# Altium PCB LP_LED_CUBE_8x8x8.PcbDoc (part 1 of 2)
Units mil, origin at the board's own origin, x right, y up, seen from the top; angles counter-clockwise.
Board outline 5225 x 2860 mil, 2 copper layers (Top Layer, Bottom Layer), stack 42.17 mil thick; 161 components, 194 nets, 901 pads, 1 vias.
Unrouted connection lines stored in the file: 1.
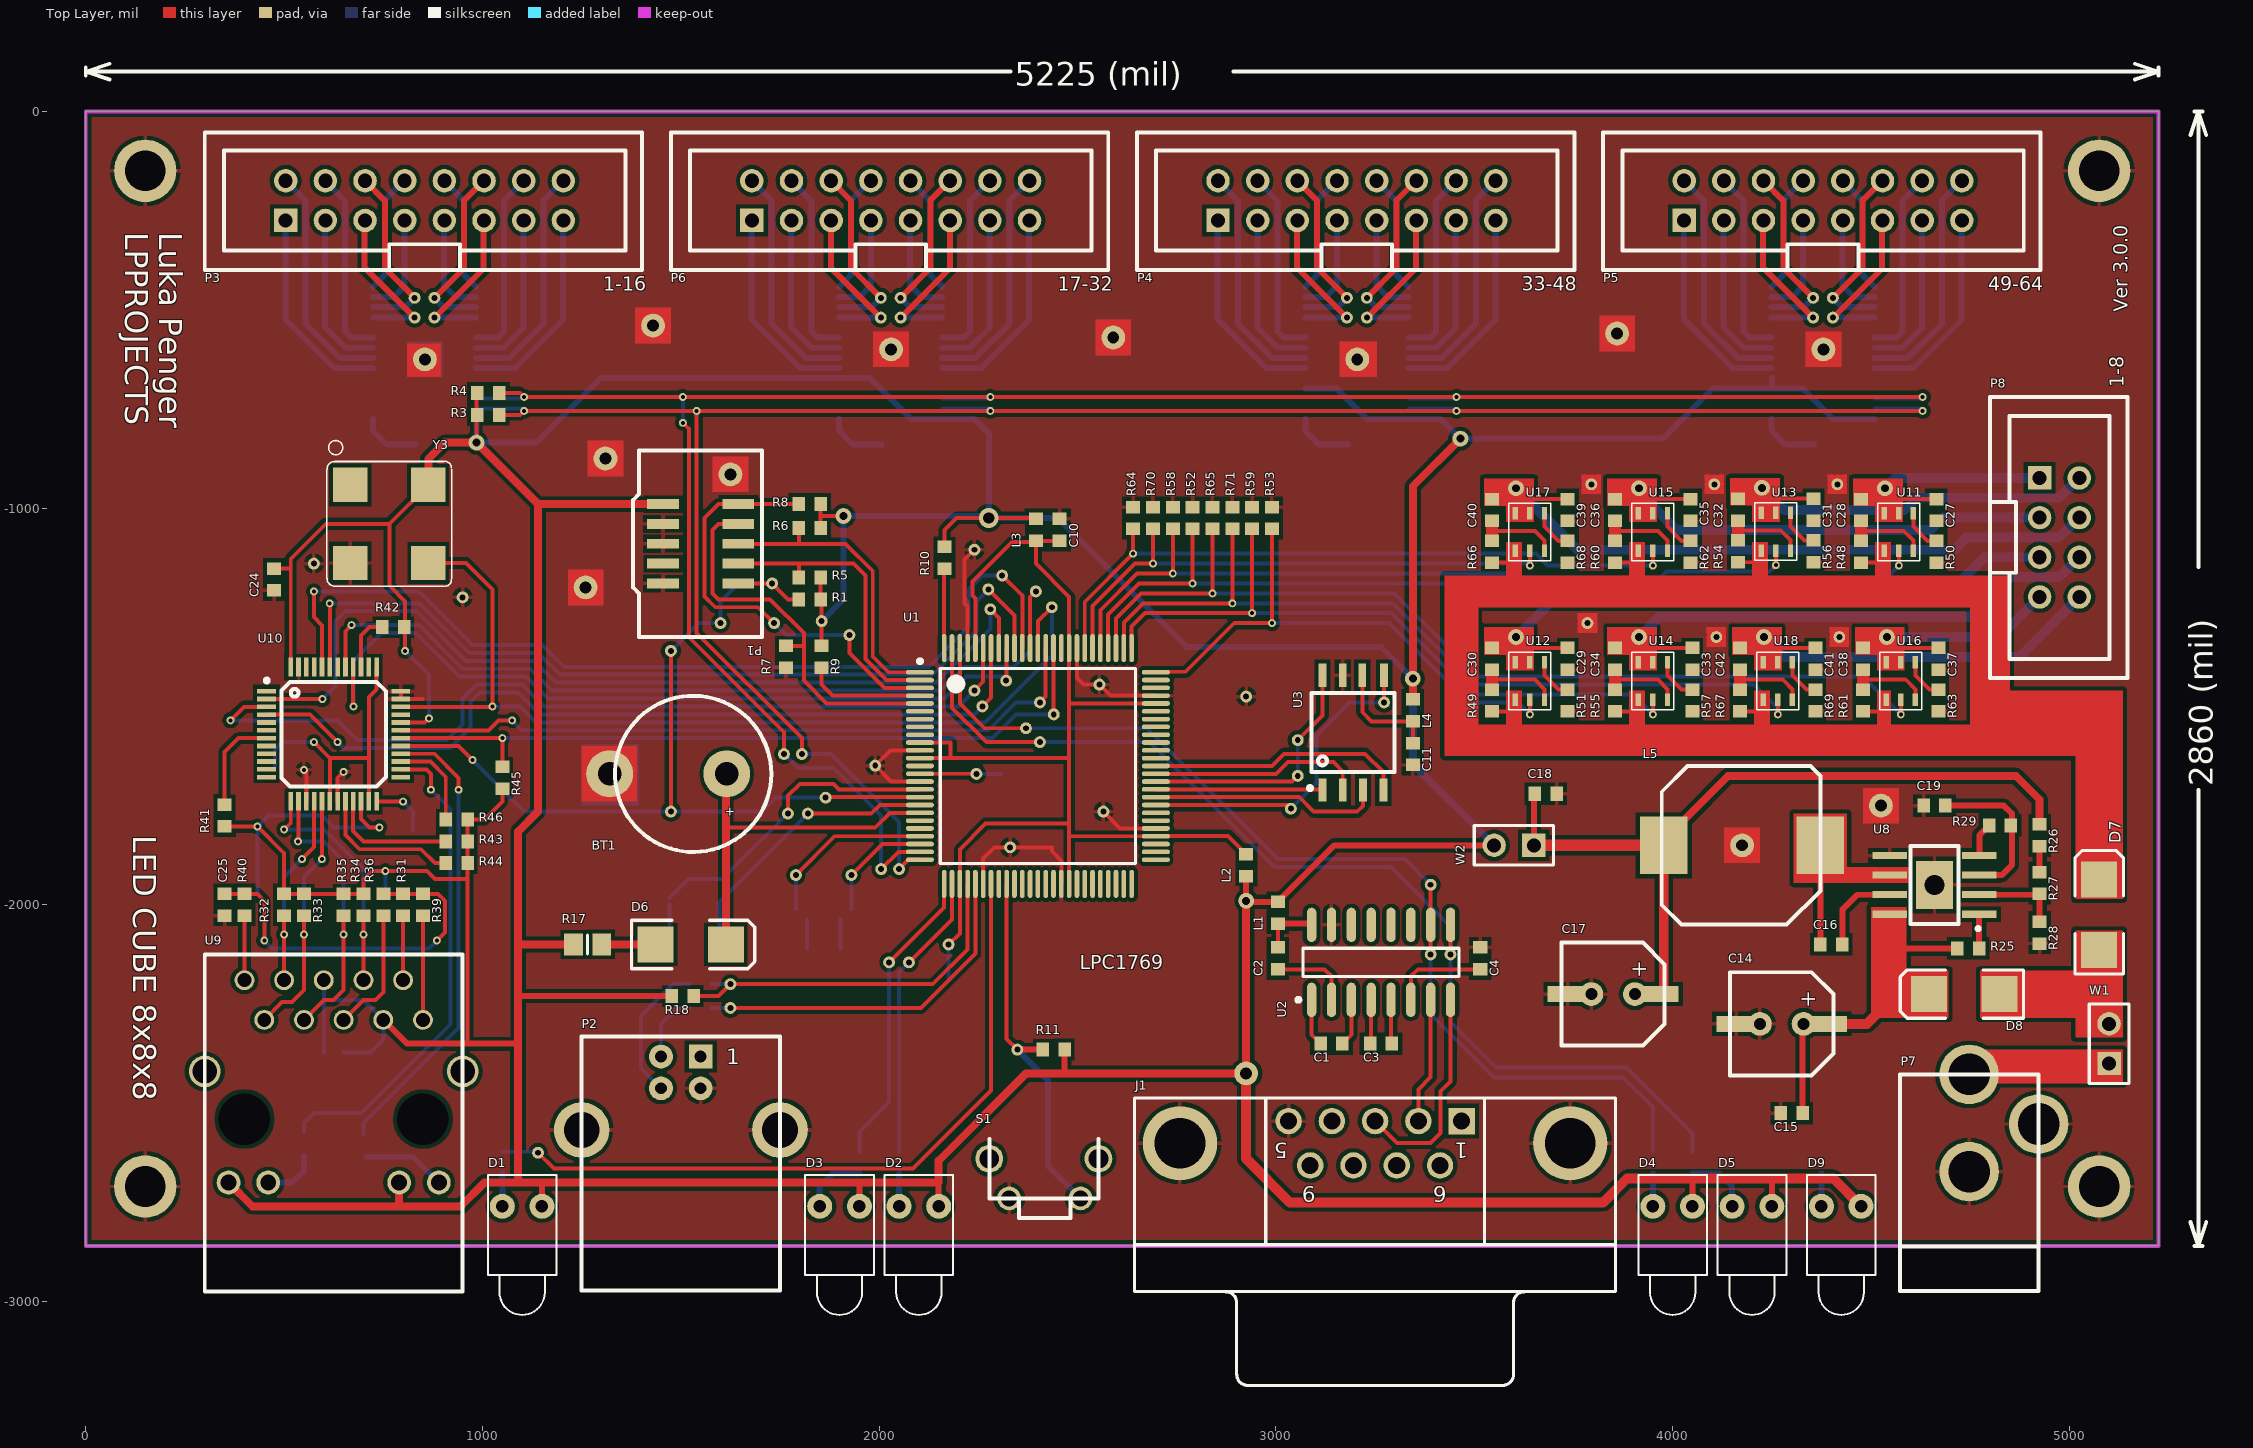
[diagram p0: Top Layer view]
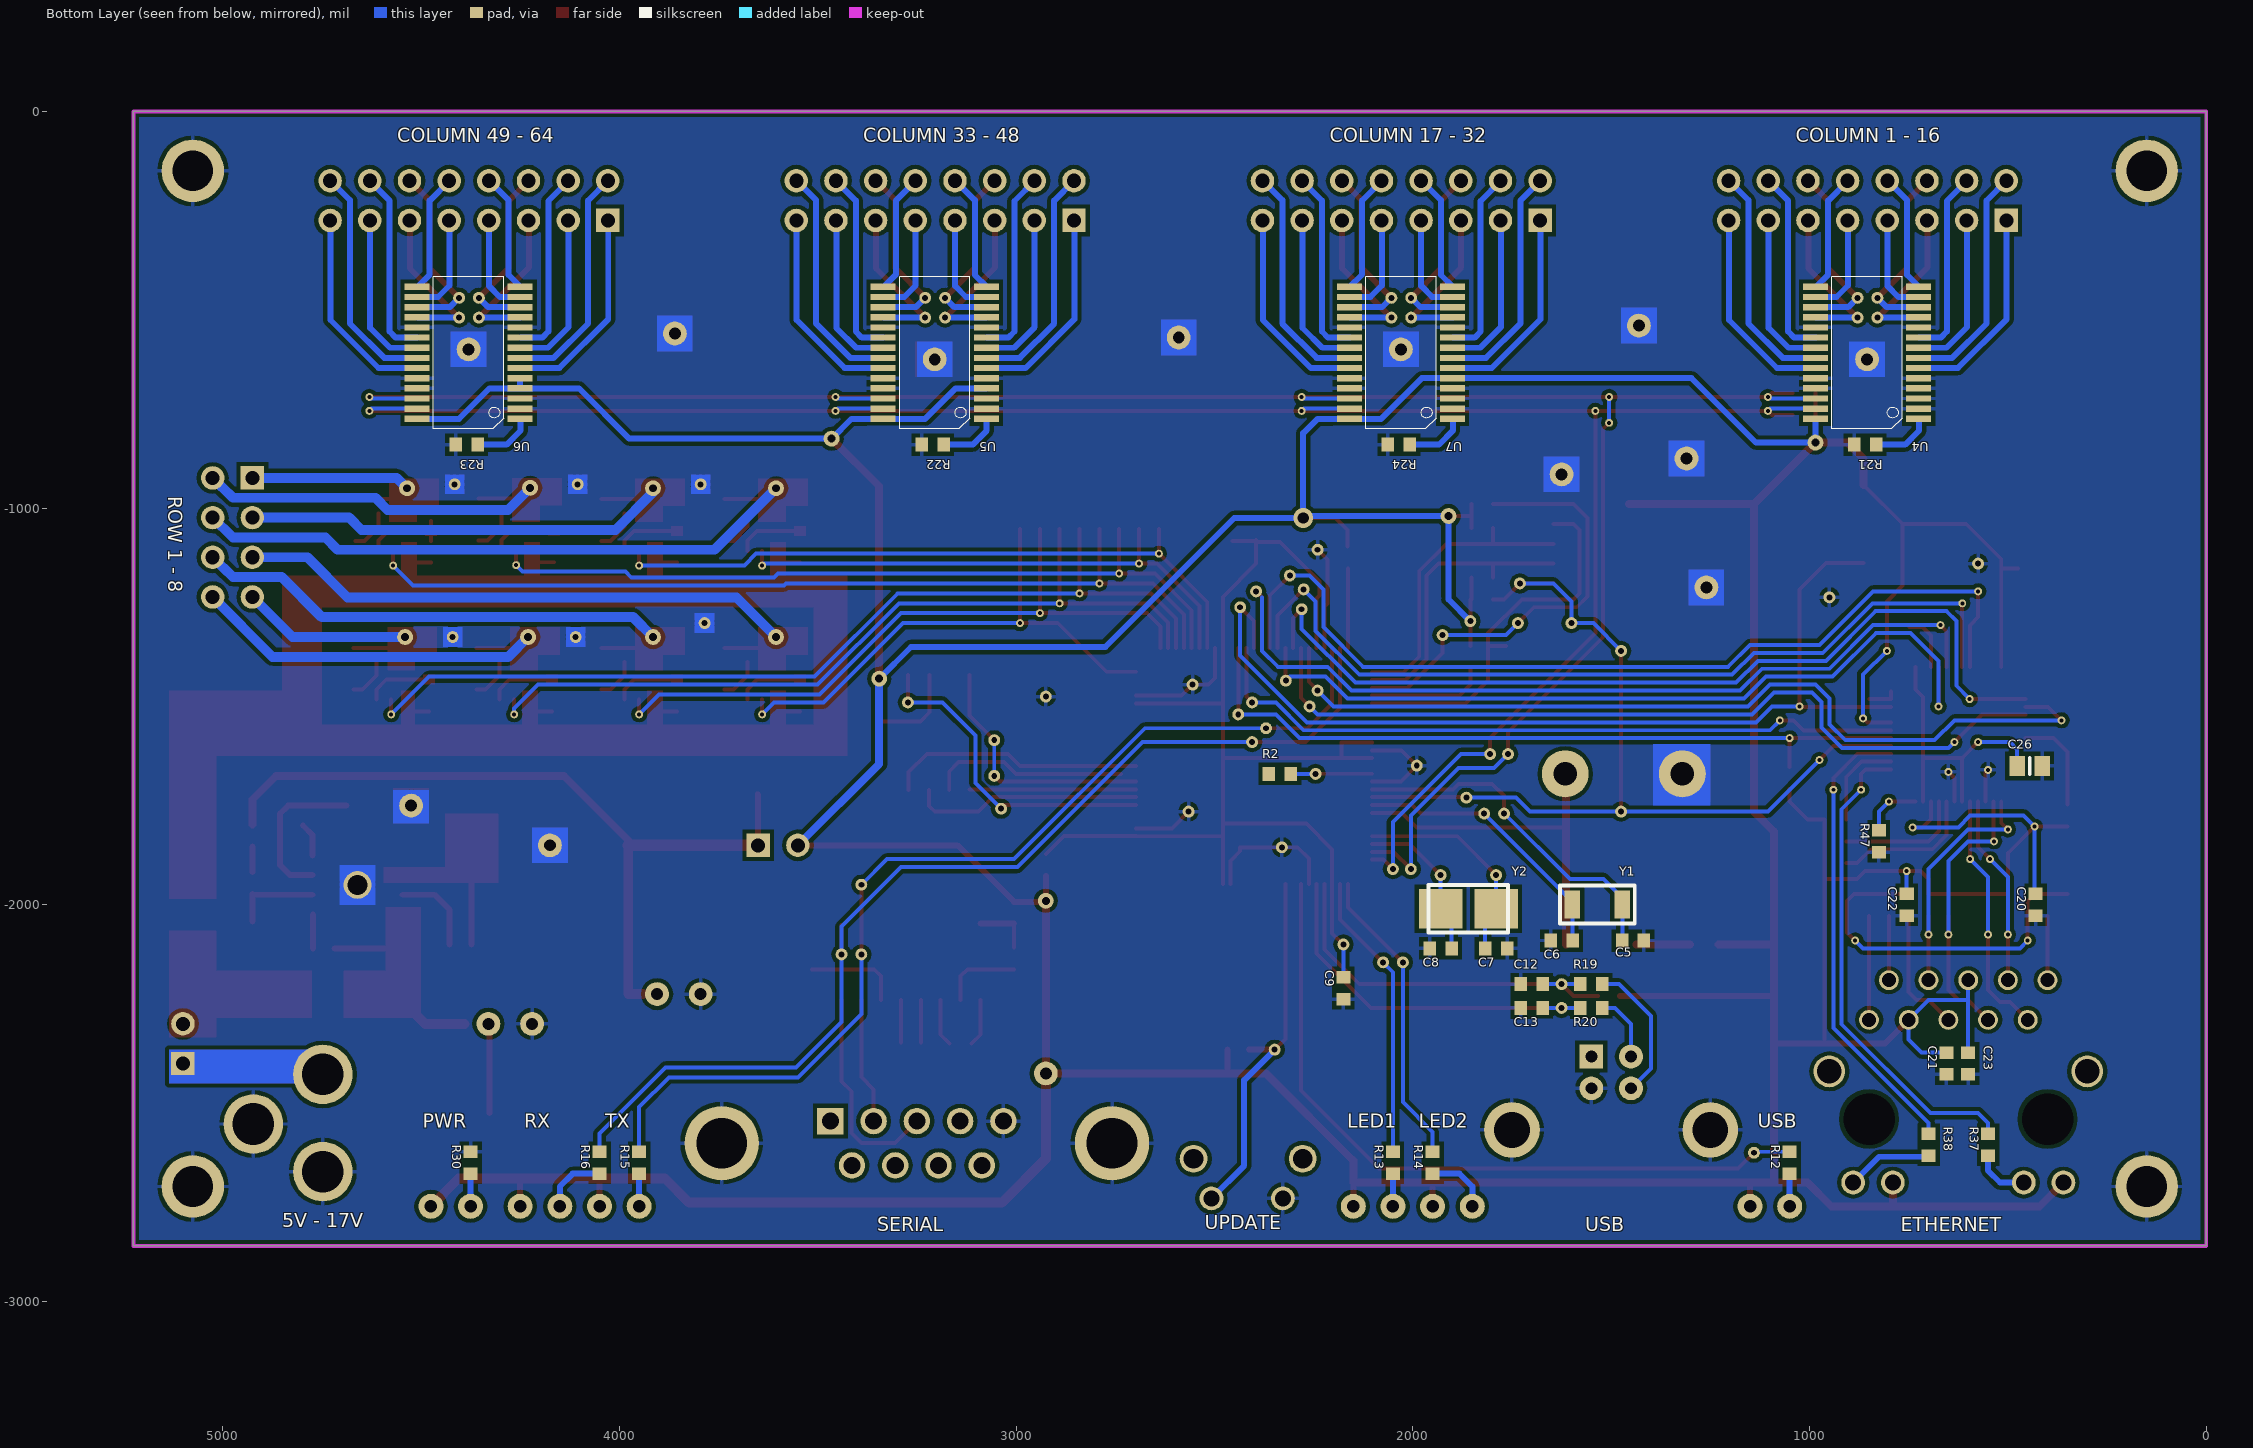
[diagram p1: Bottom Layer view, seen from below]

## Layer stack, top to bottom
Top Layer: signal copper 1.4
Dielectric: core 39.3701, FR-4, Dk 4.8
Bottom Layer: signal copper 1.4

## Board outline
0,-2860 0,0 5225,0 5225,-2860

## Design rules (kind name [scope] priority, off if disabled: settings)
Clearance [All] p1: gap=10
PolygonConnect [All] p1: connectstyle=Relief reliefconductorwidth=10 reliefentries=4 polygonreliefangle="90 Angle"
RoutingVias [All] p1: holewidth=28 width=50 viastyle="Through Hole" minholewidth=28 minwidth=50 maxholewidth=28 maxwidth=50
SilkscreenOverComponentPads [All] p1: minsilkscreentomaskgap=10
SolderMaskExpansion [All] p1: expansion=4
Width [All] p1: maxlimit=10 minlimit=10 preferedwidth=10
27 further rules are at their usual default settings.

## Classes and differential pairs
component class CPU: BT1 C1 C2 C3 C4 C5 C6 C7 C8 C9 C10 C11 C12 C13 D1 D2 D3 D4 D5 D6 J1 L1 L2 L3 L4 P1 P2 R1 R2 R3 R4 R5 R6 R7 R8 R9 R10 R11 R12 R13 R14 R15 R16 R17 R18 R19 R20 S1 U1 U2 U3 Y1 Y2
component class ETH: C20 C21 C22 C23 C24 C25 C26 R31 R32 R33 R34 R35 R36 R37 R38 R39 R40 R41 R42 R43 R44 R45 R46 R47 U9 U10 Y3
component class LED_ROWS: C27 C28 C29 C30 C31 C32 C33 C34 C35 C36 C37 C38 C39 C40 C41 C42 P8 R48 R49 R50 R51 R52 R53 R54 R55 R56 R57 R58 R59 R60 R61 R62 R63 R64 R65 R66 R67 R68 R69 R70 R71 U11 U12 U13 U14 U15 U16 U17 U18
component class LED: P3 P4 P5 P6 R21 R22 R23 R24 U4 U5 U6 U7
component class POWER: C14 C15 C16 C17 C18 C19 D7 D8 D9 L5 P7 R25 R26 R27 R28 R29 R30 U8 W1 W2

## Components (designator, comment, footprint, x,y, rotation, side; value= is the part's Value field where it differs from the comment)
BT1 "Battery" "Battery capacitor" 1665,-1670 r180 top locked
C1 "100n" 1608[0603] 3140,-2350 r180 top locked
C2 "100n" 1608[0603] 3005,-2135 r90 top
C3 "100n" 1608[0603] 3265,-2350 r180 top locked
C4 "100n" 1608[0603] 3515,-2135 r270 top
C5 "22p" 1608[0603] 1445,-2090 r0 bottom locked
C6 "22p" 1608[0603] 1625,-2090 r180 bottom
C7 "22p" 1608[0603] 1790,-2110 r0 bottom locked
C8 "22p" 1608[0603] 1930,-2110 r180 bottom locked
C9 "100n" 1608[0603] 2175,-2210 r270 bottom
C10 "100n" 1608[0603] 2455,-1055 r270 top locked
C11 "100n" 1608[0603] 3345,-1620 r90 top locked
C12 "18p" 1608[0603] 1700,-2200 r0 bottom locked
C13 "18p" 1608[0603] 1700,-2260 r0 bottom locked
C14 "220uF" "SMD CAPACITOR 220uF" 4275,-2300 r270 top locked
C15 "100n" 1608[0603] 4300,-2525 r180 top locked
C16 "0.47uF" 1608[0603] 4400,-2100 r180 top locked
C17 "220uF" "SMD CAPACITOR 220uF" 3850,-2225 r270 top
C18 "100n" 1608[0603] 3680,-1720 r0 top
C19 "0.47uF" 1608[0603] 4660,-1750 r180 top locked
C20 "100n" 1608[0603] 430,-2000 r90 bottom locked
C21 "100n" 1608[0603] 655,-2400 r90 bottom locked
C22 "100n" 1608[0603] 755,-2000 r90 bottom locked
C23 "100n" 1608[0603] 600,-2400 r90 bottom locked
C24 "100n" 1608[0603] 475,-1180 r90 top locked
C25 "100n" 1608[0603] 350,-2000 r270 top locked
C26 "100n" 6-0805_L 445,-1650 r180 bottom locked
C27 "100n" 1608[0603] 4665,-1005 r270 top
C28 "1n" 1608[0603] 4475,-1005 r270 top
C29 "100n" 1608[0603] 3735,-1380 r270 top
C30 "1n" 1608[0603] 3545,-1380 r270 top
C31 "100n" 1608[0603] 4355,-1004 r270 top
C32 "1n" 1608[0603] 4165,-1004 r270 top
C33 "100n" 1608[0603] 4050,-1380 r270 top
C34 "1n" 1608[0603] 3855,-1380 r270 top
C35 "100n" 1608[0603] 4045,-1005 r270 top
C36 "1n" 1608[0603] 3855,-1005 r270 top
C37 "100n" 1608[0603] 4670,-1380 r270 top
C38 "1n" 1608[0603] 4480,-1380 r270 top
C39 "100n" 1608[0603] 3735,-1005 r270 top
C40 "1n" 1608[0603] 3545,-1005 r270 top
C41 "100n" 1608[0603] 4360,-1380 r270 top
C42 "1n" 1608[0603] 4170,-1380 r270 top
D1 "USB LED" LED-1 1100,-2760 r270 top locked
D2 "LED1" LED-1 2100,-2760 r270 top locked
D3 "LED2" LED-1 1900,-2760 r270 top locked
D4 "LED4" LED-1 4000,-2760 r270 top locked
D5 "LED5" LED-1 4200,-2760 r270 top locked
D6 "D Schottky" SMB 1525,-2100 r0 top locked
D7 "Schottky" SMB 5075,-2025 r90 top
D8 "Schottky" SMB 4735,-2225 r180 top locked
D9 "POWER LED" LED-1 4425,-2760 r270 top locked
J1 "RS232" DSUB1.385-2H9 3250,-2975 r180 top locked
L1 "Inductor" 1608[0603] 3005,-2020 r90 top
L2 "Inductor" 1608[0603] 2925,-1900 r90 top locked
L3 "Inductor" 1608[0603] 2395,-1055 r270 top locked
L4 "Inductor" 1608[0603] 3345,-1510 r90 top locked
L5 "1.5uH" Inductor 4175,-1850 r180 top locked
P1 "JTAG Connector ULINK" "JTAG Connector ULINK" 1550,-1090 r0 top locked
P2 "USB B" "USB B" 1500,-2475 r0 top locked
P3 "Header 8X2" IDC-2x8 300,-400 r0 top locked
P4 "Header 8X2" IDC-2x8 2650,-400 r0 top locked
P5 "Header 8X2" IDC-2x8 3825,-400 r0 top locked
P6 "Header 8X2" IDC-2x8 1475,-400 r0 top locked
P7 "DC Connector" "DC Connector" 4835,-2550 r180 top locked
P8 "Header 8" IDC-2x4 4800,-720 r270 top locked
R1 "10k" 1608[0603] 1825,-1230 r0 top locked
R2 "NO" 1608[0603] 2335,-1670 r0 bottom locked
R3 "2k2" 1608[0603] 1015,-765 r0 top
R4 "2k2" 1608[0603] 1015,-710 r0 top
R5 "10k" 1608[0603] 1825,-1175 r0 top locked
R6 "10k" 1608[0603] 1825,-1050 r0 top locked
R7 "10k" 1608[0603] 1765,-1375 r270 top locked
R8 "10k" 1608[0603] 1825,-990 r0 top locked
R9 "10k" 1608[0603] 1855,-1375 r90 top locked
R10 "10k" 1608[0603] 2165,-1125 r90 top locked
R11 "1k" 1608[0603] 2440,-2365 r180 top
R12 "470R" 1608[0603] 1050,-2650 r270 bottom locked
R13 "470R" 1608[0603] 2050,-2650 r270 bottom
R14 "470R" 1608[0603] 1950,-2650 r270 bottom locked
R15 "470R" 1608[0603] 3950,-2650 r270 bottom locked
R16 "470R" 1608[0603] 4050,-2650 r270 bottom locked
R17 "50R" 6-0805_N 1265,-2100 r180 top locked
R18 "1k5" 1608[0603] 1505,-2230 r0 top locked
R19 "33R" 1608[0603] 1550,-2200 r180 bottom locked
R20 "33R" 1608[0603] 1550,-2260 r180 bottom locked
R21 "?" 1608[0603] 860,-840 r0 bottom locked
R22 "?" 1608[0603] 3210,-840 r180 bottom locked
R23 "?" 1608[0603] 4385,-840 r180 bottom locked
R24 "?" 1608[0603] 2035,-840 r0 bottom locked
R25 "10k" 1608[0603] 4745,-2110 r180 top locked
R26 "0R" 1608[0603] 4925,-1825 r90 top locked
R27 "226k" 1608[0603] 4925,-1945 r90 top locked
R28 "49.9k" 1608[0603] 4925,-2070 r90 top locked
R29 "100k" 1608[0603] 4825,-1800 r0 top locked
R30 "470R" 1608[0603] 4375,-2650 r270 bottom locked
R31 "75R" 1608[0603] 800,-2000 r90 top locked
R32 "50R" 1608[0603] 500,-2000 r90 top locked
R33 "50R" 1608[0603] 550,-2000 r90 top
R34 "50R" 1608[0603] 700,-2000 r90 top locked
R35 "50R" 1608[0603] 650,-2000 r90 top locked
R36 "75R" 1608[0603] 750,-2000 r90 top locked
R37 "470R" 1608[0603] 550,-2605 r90 bottom locked
R38 "470R" 1608[0603] 700,-2605 r90 bottom locked
R39 "75R" 1608[0603] 850,-2000 r270 top locked
R40 "75R" 1608[0603] 400,-2000 r270 top locked
R41 "10k" 1608[0603] 350,-1775 r270 top locked
R42 "2k2" 1608[0603] 775,-1300 r180 top locked
R43 "2k2" 1608[0603] 935,-1840 r180 top locked
R44 "2k2" 1608[0603] 935,-1895 r0 top
R45 "2k2" 1608[0603] 1050,-1680 r90 top locked
R46 "2k2" 1608[0603] 935,-1785 r180 top locked
R47 "4k7" 1608[0603] 825,-1840 r270 bottom locked
R48 "10k" 1608[0603] 4475,-1110 r270 top
R49 "10k" 1608[0603] 3545,-1485 r270 top
R50 "0R" 1608[0603] 4665,-1110 r270 top
R51 "0R" 1608[0603] 3735,-1485 r270 top
R52 "10k" 1608[0603] 2790,-1025 r270 top locked
R53 "10k" 1608[0603] 2990,-1025 r270 top locked
R54 "10k" 1608[0603] 4165,-1109 r270 top
R55 "10k" 1608[0603] 3855,-1485 r270 top
R56 "0R" 1608[0603] 4355,-1109 r270 top
R57 "0R" 1608[0603] 4050,-1485 r270 top
R58 "10k" 1608[0603] 2740,-1025 r270 top
R59 "10k" 1608[0603] 2940,-1025 r270 top locked
R60 "10k" 1608[0603] 3855,-1110 r270 top
R61 "10k" 1608[0603] 4480,-1485 r270 top
R62 "0R" 1608[0603] 4045,-1110 r270 top
R63 "0R" 1608[0603] 4670,-1485 r270 top
R64 "10k" 1608[0603] 2640,-1025 r270 top locked
R65 "10k" 1608[0603] 2840,-1025 r270 top locked
R66 "10k" 1608[0603] 3545,-1110 r270 top
R67 "10k" 1608[0603] 4170,-1485 r270 top
R68 "0R" 1608[0603] 3735,-1110 r270 top
R69 "0R" 1608[0603] 4360,-1485 r270 top
R70 "10k" 1608[0603] 2690,-1025 r270 top locked
R71 "10k" 1608[0603] 2890,-1025 r270 top locked
S1 "FW Update" SWITCH-TACTILE-90 2415,-2690 r0 top locked
U1 "LPC1768FBD100" SOT407-1_N 2400,-1650 r0 top locked
U2 "MAX2232" SOIC16_N 3265,-2145 r90 top locked
U3 "AT45DB321D" AT45DB321D 3195,-1565 r90 top locked
U4 "TLC59116" TSSOP28 725,-775 r90 bottom locked
U5 "TLC59116" TSSOP28 3075,-775 r90 bottom locked
U6 "TLC59116" TSSOP28 4250,-775 r90 bottom locked
U7 "TLC59116" TSSOP28 1900,-775 r90 bottom locked
U8 "TPS56528" TPS56528 4660,-1950 r180 top locked
U9 "RJ45 Ethernet" "RJ45 Ethernet connector" 625,-2445 r90 top locked
U10 "DP83848C" DP83848C 625,-1570 r0 top locked
U11 "SI3861BDV" "TSOP 6" 4570,-1060 r270 top
U12 "SI3861BDV" "TSOP 6" 3640,-1435 r270 top
U13 "SI3861BDV" "TSOP 6" 4260,-1059 r270 top
U14 "SI3861BDV" "TSOP 6" 3950,-1435 r270 top
U15 "SI3861BDV" "TSOP 6" 3950,-1060 r270 top
U16 "SI3861BDV" "TSOP 6" 4575,-1435 r270 top
U17 "SI3861BDV" "TSOP 6" 3640,-1060 r270 top
U18 "SI3861BDV" "TSOP 6" 4265,-1435 r270 top
W1 "Jumper" HDR1X2 5100,-2400 r90 top locked
W2 "Jumper" HDR1X2 3650,-1850 r180 top locked
Y1 "32.768KHz" "Crystal 4.1x1.5" 1535,-2000 r0 bottom locked
Y2 "12MHz" "5x3.2 Crystal" 1860,-2010 r0 bottom locked
Y3 "XTAL 50MHz" "XTAL ACT9200" 765,-1040 r270 top locked

## Footprints (in the part's own frame and the unit in brackets; to place one, negate y for a bottom-side part, rotate by r counter-clockwise, add the part's x,y. Pads: shape width x height; smd on the part's side, far side on the other; paste and mask are expansions set on the pad)
"5x3.2 Crystal" [mil]
  rect 110x100 smd: 1(-70,0) 2(70,0)
  silkscreen extent -100,-60 100,60
6-0805_L [mm] "Chip Resistor, Body 2.0x1.2mm, IPC High Density"
  rect 1x1.3 smd: 1(-0.8,0) 2(0.8,0)
  silkscreen extent 0,-0.55 0,0.55, body extent -1.07,-0.7 1.07,0.7, height 0.7
6-0805_N [mm] "Chip Resistor, Body 2.0x1.2mm, IPC Medium Density"
  rect 1.2x1.4 smd: 1(-0.9,0) 2(0.9,0)
  silkscreen extent 0,-0.6 0,0.6, body extent -1.07,-0.7 1.07,0.7, height 0.7
1608[0603] [mm] "Chip Capacitor, Body 1.6x0.8mm, IPC High Density"
  rect 0.8x0.9 smd: 1(-0.7,0) 2(0.7,0)
  body extent -0.87,-0.48 0.87,0.48, height 1.3
AT45DB321D [mm] "SPI Flash SOIC 8"
  rect 1.5x0.508 smd: 1(-3.7,1.975) 2(-3.7,0.675) 3(-3.7,-0.625) 4(-3.7,-1.925) 5(3.65,-1.975) 6(3.65,-0.575) 7(3.65,0.675) 8(3.65,1.975)
  silkscreen extent -3.7,-2.62 2.5,2.9
"Battery capacitor" [mm] "Battery cap"
  round 3 hole 1.5: 1(1.25,0) 2(8.75,0)
  silkscreen extent -1.6,-5 8.4,5
"Crystal 4.1x1.5" [mm] "Crystal 4.1x1.5"
  rect 1x1.8 smd: 1(-1.6,-0.02) 2(1.6,-0.02)
  silkscreen extent -2.4,-1.25 2.4,1.2
"DC Connector" [mil]
  round 150 hole 105: 1(87.5,-122.5) 2(87.5,122.5) 3(-87.5,2.5)
  silkscreen extent -88,-123 262,423
DP83848C [mm] "Ethernet PHY LQFP48"
  rect 1.2x0.3 smd: 1(-4.3,2.75) 2(-4.3,2.25) 3(-4.3,1.75) 4(-4.3,1.25) 5(-4.3,0.75) 6(-4.3,0.25) 7(-4.3,-0.25) 8(-4.3,-0.75) 9(-4.3,-1.25) 10(-4.3,-1.75) 11(-4.3,-2.25) 12(-4.3,-2.75) 25(4.3,-2.75) 26(4.3,-2.25) 27(4.3,-1.75) 28(4.3,-1.25) 29(4.3,-0.75) 30(4.3,-0.25) 31(4.3,0.25) 32(4.3,0.75) 33(4.3,1.25) 34(4.3,1.75) 35(4.3,2.25) 36(4.3,2.75)
  rect 0.3x1.2 smd: 13(-2.75,-4.3) 14(-2.25,-4.3) 15(-1.75,-4.3) 16(-1.25,-4.3) 17(-0.75,-4.3) 18(-0.25,-4.3) 19(0.25,-4.3) 20(0.75,-4.3) 21(1.25,-4.3) 22(1.75,-4.3) 23(2.25,-4.3) 24(2.75,-4.3) 37(2.75,4.3) 38(2.25,4.3) 39(1.75,4.3) 40(1.25,4.3) 41(0.75,4.3) 42(0.25,4.3) 43(-0.25,4.3) 44(-0.75,4.3) 45(-1.25,4.3) 46(-1.75,4.3) 47(-2.25,4.3) 48(-2.75,4.3)
  silkscreen extent -4.41,-3.35 3.35,3.56
DSUB1.385-2H9 [mm] "Connector; D Subminiature; 9 Position; Right Angle; Pitch 1.385 mm"
  rect 1.69x1.69 hole 1.09: 1(-5.54,-10.92)
  round 1.69 hole 1.09: 2(-2.77,-10.92) 3(0,-10.92) 4(2.77,-10.92) 5(5.54,-10.92) 6(-4.155,-8.08) 7(-1.385,-8.08) 8(1.385,-8.08) 9(4.155,-8.08)
  round 4.76 hole 3.26: 10(-12.495,-9.5) 11(12.495,-9.5)
  silkscreen extent -15.4,-12.4 15.4,6
HDR1X2 [mm] "Connector; Header; 2 Position"
  rect 1.5x1.5 hole 0.9: 1(0,0)
  round 1.5 hole 0.9: 2(2.54,0)
  silkscreen extent -1.27,-1.27 3.81,1.27
IDC-2x4 [mm] "IDC Male Connector"
  rect 1.5x1.5 hole 0.9: 1(5.182,3.175)
  round 1.5 hole 0.9: 2(5.182,5.715) 3(7.722,3.175) 4(7.722,5.715) 5(10.262,3.175) 6(10.262,5.715) 7(12.802,3.175) 8(12.802,5.715)
  silkscreen extent 0,0 17.98,8.8
IDC-2x8 [mm] "IDC Male Connector"
  rect 1.5x1.5 hole 0.9: 1(5.182,3.175)
  round 1.5 hole 0.9: 2(5.182,5.715) 3(7.722,3.175) 4(7.722,5.715) 5(10.262,3.175) 6(10.262,5.715) 7(12.802,3.175) 8(12.802,5.715) 9(15.342,3.175) 10(15.342,5.715) 11(17.882,3.175) 12(17.882,5.715) 13(20.422,3.175) 14(20.422,5.715) 15(22.962,3.175) 16(22.962,5.715)
  silkscreen extent 0,0 28,8.8
Inductor [mil]
  rect 120x145 smd: 1(-197.5,0) 2(197.5,0)
  silkscreen extent -198,-200 203,200
"JTAG Connector ULINK" [mil]
  rect 80x25 smd: 1(-95,100) 2(95,100) 3(-95,50) 4(95,50) 5(-95,0) 6(95,0) 7(-95,-50) 8(95,-50) 9(-95,-100) 10(95,-100)
  silkscreen extent -170,-235 155,235
LED-1 [mm] "LED; 2 Leads"
  round 1.6 hole 0.8: 1(0,1.27) 2(0,-1.27)
  silkscreen extent -2,-2.2 6.95,2.2
"RJ45 Ethernet connector" [mil]
  round 50 hole 35: 1(155,175) 2(255,125) 3(155,75) 4(255,25) 5(155,-25) 6(255,-75) 7(155,-125) 8(255,-175) 9(255,225) 10(155,-225)
  round 60 hole 40: 11(-255,265) 12(-255,165) 13(-255,-165) 14(-255,-265)
  round 80 hole 62: GND(25,325) GND(25,-325)
  round 0 hole 130: ""(-95,225) ""(-95,-225)
  silkscreen extent -530,-325 320,325
SMB [mm] "DO-214-AA/SMB; 2 C-Bend Leads; Body 5.3 x 3.6 mm, inc. leads (LxW)"
  rect 2.3x2.3 smd: 1(-2.25,0) 2(2.25,0)
  silkscreen extent -3.8,-1.55 4.1,1.55
"SMD CAPACITOR 220uF" [mil]
  rect 40x100 smd: 1(0,115) 2(0,-115)
  round 60 hole 30: 1(0,55) 2(0,-55)
  silkscreen extent -130,-130 130,130
SOIC16_N [mm] "SOIC, 16-Leads, Body 9.9x3.9mm, Pitch 1.27mm, IPC Medium Density"
  oval 2.2x0.6 smd: 1(-2.4,4.445) 2(-2.4,3.175) 3(-2.4,1.905) 4(-2.4,0.635) 5(-2.4,-0.635) 6(-2.4,-1.905) 7(-2.4,-3.175) 8(-2.4,-4.445) 9(2.4,-4.445) 10(2.4,-3.175) 11(2.4,-1.905) 12(2.4,-0.635) 13(2.4,0.635) 14(2.4,1.905) 15(2.4,3.175) 16(2.4,4.445)
  silkscreen extent -2.52,-5 0.9,5.42, body extent -2,-5 2,5, height 1.91
SOT407-1_N [mm] "Thin QFP, 100-Leads, Body 14x14mm, Pitch 0.5mm, IPC Medium Density"
  oval 1.8x0.3 smd: 1(-7.55,6) 2(-7.55,5.5) 3(-7.55,5) 4(-7.55,4.5) 5(-7.55,4) 6(-7.55,3.5) 7(-7.55,3) 8(-7.55,2.5) 9(-7.55,2) 10(-7.55,1.5) 11(-7.55,1) 12(-7.55,0.5) 13(-7.55,0) 14(-7.55,-0.5) 15(-7.55,-1) 16(-7.55,-1.5) 17(-7.55,-2) 18(-7.55,-2.5) 19(-7.55,-3) 20(-7.55,-3.5) 21(-7.55,-4) 22(-7.55,-4.5) 23(-7.55,-5) 24(-7.55,-5.5) 25(-7.55,-6) 51(7.55,-6) 52(7.55,-5.5) 53(7.55,-5) 54(7.55,-4.5) 55(7.55,-4) 56(7.55,-3.5) 57(7.55,-3) 58(7.55,-2.5) 59(7.55,-2) 60(7.55,-1.5) 61(7.55,-1) 62(7.55,-0.5) 63(7.55,0) 64(7.55,0.5) 65(7.55,1) 66(7.55,1.5) 67(7.55,2) 68(7.55,2.5) 69(7.55,3) 70(7.55,3.5) 71(7.55,4) 72(7.55,4.5) 73(7.55,5) 74(7.55,5.5) 75(7.55,6)
  oval 0.3x1.8 smd: 26(-6,-7.55) 27(-5.5,-7.55) 28(-5,-7.55) 29(-4.5,-7.55) 30(-4,-7.55) 31(-3.5,-7.55) 32(-3,-7.55) 33(-2.5,-7.55) 34(-2,-7.55) 35(-1.5,-7.55) 36(-1,-7.55) 37(-0.5,-7.55) 38(0,-7.55) 39(0.5,-7.55) 40(1,-7.55) 41(1.5,-7.55) 42(2,-7.55) 43(2.5,-7.55) 44(3,-7.55) 45(3.5,-7.55) 46(4,-7.55) 47(4.5,-7.55) 48(5,-7.55) 49(5.5,-7.55) 50(6,-7.55) 76(6,7.55) 77(5.5,7.55) 78(5,7.55) 79(4.5,7.55) 80(4,7.55) 81(3.5,7.55) 82(3,7.55) 83(2.5,7.55) 84(2,7.55) 85(1.5,7.55) 86(1,7.55) 87(0.5,7.55) 88(0,7.55) 89(-0.5,7.55) 90(-1,7.55) 91(-1.5,7.55) 92(-2,7.55) 93(-2.5,7.55) 94(-3,7.55) 95(-3.5,7.55) 96(-4,7.55) 97(-4.5,7.55) 98(-5,7.55) 99(-5.5,7.55) 100(-6,7.55)
  silkscreen extent -7.67,-6.25 6.25,6.82, body extent -7,-7 7,7, height 1.6
SWITCH-TACTILE-90 [mil]
  round 60 hole 40: 1(-87.5,-50) 2(92.5,-50)
  round 70 hole 50: GND(-137.5,50) GND(137.5,50)
  silkscreen extent -138,-100 138,100
TPS56528 [mm] "Step-Down Converter SO PowerPAD"
  rect 2.2x0.45 smd: 1(-2.875,1.875) 2(-2.875,0.625) 3(-2.875,-0.625) 4(-2.875,-1.875) 5(2.875,-1.875) 6(2.875,-0.625) 7(2.875,0.625) 8(2.875,1.875)
  rect 2.4x3.1 smd: 5(0,0)
  silkscreen extent -2.9,-2.5 1.55,2.9
"TSOP 6" [mm]
  rect 0.8x0.35 smd: 1(-1.194,0.94) 2(-1.194,0) 3(-1.194,-0.94) 4(1.219,-0.94) 5(1.219,0) 6(1.219,0.94)
  silkscreen extent -1.83,-1.35 1.85,1.35
TSSOP28 [mm]
  rect 0.4x1.6 smd: 1(0,0) 2(0.65,0) 3(1.3,0) 4(1.95,0) 5(2.6,0) 6(3.25,0) 7(3.9,0) 8(4.55,0) 9(5.2,0) 10(5.85,0) 11(6.5,0) 12(7.15,0) 13(7.8,0) 14(8.45,0) 15(8.45,6.6) 16(7.8,6.6) 17(7.15,6.6) 18(6.5,6.6) 19(5.85,6.6) 20(5.2,6.6) 21(4.55,6.6) 22(3.9,6.6) 23(3.25,6.6) 24(2.6,6.6) 25(1.95,6.6) 26(1.3,6.6) 27(0.65,6.6) 28(0,6.6)
  silkscreen extent -0.65,1.05 9.1,5.55
"USB B" [mil]
  rect 60x60 hole 30: 1(50,92.5)
  round 60 hole 30: 2(-50,92.5) 3(-50,12.5) 4(50,12.5)
  round 140 hole 90: 5(-250,-92.5) 5(250,-92.5)
  silkscreen extent -250,-498 250,142
"XTAL ACT9200" [mm]
  rect 2.2x2.2 smd mask-25.4: 1(-2.5,-2.5) 2(2.5,-2.5) 3(2.5,2.5) 4(-2.5,2.5)
  silkscreen extent -5.34,-4 4,4

## Part data
BT1: "Multicell Battery"
C1 C2 C3 C4 C5 C6 C7 C8 C9 C10 C11 C12 C13 C15 C16 C18 C19 C20 C21 C22 C23 C24 C25 C26 C27 C28 C29 C30 C31 C32 C33 C34 C35 C36 C37 C38 C39 C40 C41 C42: library part Cap, "Capacitor"
C14 C17: library part "Cap Pol1", "Capacitor"
D1 D2 D3 D4 D5 D9: library part LED0, "Typical INFRARED GaAs LED"
D6: "Schottky Diode"
D7 D8: library part "D Schottky", "Schottky Diode"
J1: library part "D Connector 9", "Receptacle Assembly, 9 Position, Right Angle"
L5: library part "Inductor Iron", "Magnetic-Core Inductor"
P1: "JTAG Connector"
P2: "USB Connector"
P3 P4 P5 P6: "Header, 8-Pin, Dual row"
P7: "DC Power Connector"
P8: "Header, 8-Pin"
R1 R2 R3 R4 R5 R6 R7 R8 R9 R10 R11 R12 R13 R14 R15 R16 R17 R18 R19 R20 R21 R22 R23 R24 R25 R26 R27 R28 R29 R30 R31 R32 R33 R34 R35 R36 R37 R38 R39 R40 R41 R42 R43 R44 R45 R46 R47 R48 R49 R50 R51 R52 R53 R54 R55 R56 R57 R58 R59 R60 R61 R62 R63 R64 R65 R66 R67 R68 R69 R70 R71: library part Res2, "Resistor"
S1: library part SW-PB, "Switch"
U1: "32-bit ARM Cortex-M3 microcontroller; up to 512 kB flash and 64 kB SRAM with Ethernet, USB 2.0 Host/Device/OTG, CAN"
U2: "Dual 232 +3V3"
U3: "SPI Flash 32MB"
U4 U5 U6 U7: "16-Channel i2c LED driver"
U8: "Step-Down Converter 5A 4.5V-18V"
U9: "Ethernet Connector"
U10: "Ethernet PHY"
U11 U12 U13 U14 U15 U16 U17 U18: "4.5 - 20V 2.3A Load Switch"
W1 W2: "Jumper Wire"
Y1 Y2: library part XTAL, "Crystal Oscillator"
Y3: library part "XTAL ACT9200"

## Free pads (board coordinates)
  round 30 hole 15: 0(575,-1140) 0(829,-470) 0(2004,-470) 0(3179,-470) 0(4354,-470) 1(879,-470) 1(950,-1225) 1(2054,-470) 1(3229,-470) 1(4404,-470) 2(829,-520) 2(2004,-520) 2(3179,-520) 2(4354,-520) 3(879,-520) 3(2054,-520) 3(3229,-520) 3(4404,-520) 5(2925,-1475) 5(3272.76,-1490) 6(2565,-1765) 7(1990,-1649.08) 8(1140,-2625) 8(1600,-1290) 10(2240,-1105) 11(2005,-1910) 12(2050,-1910) 13(1805,-1620) 14(1760,-1620) 17(1475,-1765) 18(1475,-1360) 19(3785,-1290) 19(3795,-940) 19(4105,-940) 19(4110,-1325) 19(4415,-940) 19(4420,-1325) 25(3390,-2125) 25(3440,-2125) 27(1625,-2260) 27(1625,-2200) 27(2330,-1855) 28(2025,-2145) 29(2075,-2145) 35(1735,-1290) 36(1925,-1320) 37(2405,-1590) 38(2370,-1555) 39(3390,-1949.39) 41(2555,-1445) 42(2440,-1520) 43(2405,-1490) 46(2435,-1250) 50(2260,-1500) 53(2240,-1460) 56(2320,-1435) 57(2395,-1210) 61(2280,-1255) 62(2275,-1205) 63(2310,-1170) 70(2348.13,-2365) 73(2175,-2100) 76(1855,-1285) 79(3055,-1675) 80(3055,-1585) 82(3037.76,-1757.76) 84(1790,-1925) 84(1930,-1925) 86(2245,-1670) 88(1770,-1770) 89(1820,-1770) 91(1730,-1190) 92(1865,-1729.97)
  round 40 hole 20: 0(985,-835) 4(3605,-1325) 4(3605,-950) 4(3915,-1325) 4(3915,-950) 4(4225,-949) 4(4230,-1325) 4(4535,-950) 4(4540,-1325) 25(3345,-1430) 26(3465,-825) 65(2276.25,-1025) 69(2925,-1990) 78(1910,-1020)
  round 20 hole 10: 1(1105,-755) 1(2280,-755) 1(3455,-755) 1(4630,-755) 2(550,-1660) 2(1105,-720) 2(2280,-720) 2(3455,-720) 2(4630,-720) 8(1540,-755) 9(1505,-785) 10(1505,-720) 13(3640,-1520) 13(3640,-1145) 13(3950,-1520) 13(3950,-1145) 13(4260,-1144) 13(4265,-1520) 13(4570,-1145) 13(4575,-1520) 16(575,-1590) 17(550,-2075) 18(500,-2075) 19(595,-1885) 20(545,-1885) 21(650,-2075) 22(700,-2075) 22(2640,-1115) 22(2690,-1140) 22(2740,-1165) 22(2790,-1190) 22(2840,-1215) 22(2890,-1240) 22(2940,-1265) 22(2990,-1290) 23(535.07,-1840) 24(500,-1810) 25(870,-1710) 26(940,-1710) 27(885,-2090) 28(450,-2090) 29(800,-1740) 30(650,-1665) 31(740,-1805) 32(432.56,-1802.56) 33(975,-1635) 34(755,-1915) 44(1050,-1579.98) 45(1075,-1535) 47(1025,-1500) 48(865,-1530) 49(805,-1360) 51(635,-1590) 52(365,-1535) 54(675,-1500) 55(670,-1295) 58(596.42,-1481.42) 59(575,-1210) 60(615,-1240)
  round 60 hole 30: 11(2030,-600) 11(3205,-625) 11(4380,-600) 12(855,-625) 23(4175,-1850) 23(4525,-1750) 28(1310,-875) 29(1625,-915) 30(1260,-1200) 31(2590,-570) 32(1430,-540) 33(3860,-560) 68(2925,-2425)
  round 70 hole 50: 16(4660,-1950)
  round 157.48 hole 102.36: ""(150,-2710) ""(150,-150) ""(5075,-2710) ""(5075,-150)

## Via types
v1: diameter 50, hole 28, Top Layer to Bottom Layer, 1 vias

## Nets (pads, with @x,y where several pads share a name; then routed paths per layer and width w, separated by ;. In a path a pad name is that pad's centre, name@x,y a point inside that pad or via, vN(x,y) a via of type N, cw(c..) or ccw(c..) an arc to the next point about the centre after c; other vN are vias at no path point)
3V3: C20.2 C21.2 C22.2 C23.2 C24.2 D1.1 D2.1 D3.1 D4.1 D5.1 D9.1 L1.2 L2.1 L3.1 L4.2 P1.1 pad.0@985,-835 pad.25@3345,-1430 pad.26@3465,-825 pad.31@740,-1805 pad.32@432.56,-1802.56 pad.34 pad.48 pad.49 pad.65 pad.68 pad.69 pad.76 pad.78 R1.2 R3.1 R4.1 R5.2 R6.2 R8.2 R9.2 R10.2 R11.1 R17.2 R18.1 R32.2 R33.2 R34.2 R35.2 R41.2 R42.1 R43.1 R44.2 R45.1 R46.1 U4.28 U5.4 U5.28 U6.4 U6.5 U6.28 U7.5 U7.28 U9.4 U9.7 U9.11 U9.13 U10.22 U10.32 U10.48 W2.2 Y3.4 | length 20709.7
  Top Layer w10: R41.2@350,-1802.56 pad.32@432.56,-1802.56 500,-1870 R32.2@500,-1972.44 R33.2@550,-1972.44 R35.2@650,-1972.44 R34.2@700,-1972.44 700,-1935 720,-1915 pad.34@755,-1915 860,-1915 880,-1935 962.56,-1935 ; C24.2@475,-1152.44 516.73,-1152.44 ; U10.48@516.73,-1400.71 516.73,-1128.27 605,-1040 765.56,-1040 ; U10.22@693.9,-1739.29 693.9,-1783.9 715,-1805 pad.31@740,-1805 ; U10.32@794.29,-1540.47 854.53,-1540.47 pad.48@865,-1530 ; pad.49@805,-1360 805,-1235 765.56,-1195.56 765.56,-1039.44 Y3.4@863.43,-941.57 ; 962.56,-2347.56 962.56,-1935 ; pad.0@985,-835 R4.1@985,-710 ; R45.1@1050,-1707.56 1050,-1740 1005,-1785 R46.1@962.56,-1785 R43.1@962.56,-1840 962.56,-1935 ; R1.2@1852.56,-1230 R5.2@1852.56,-1175 ; R6.2@1852.56,-1050 R8.2@1852.56,-990 ; 1852.56,-1020 pad.78@1910,-1020 ; R9.2@1855,-1347.44 pad.76@1855,-1285 R1.2@1855,-1230 ; R10.2@2165,-1097.44 2165,-1055 2195,-1025 v1(2276.25,-1025) L3.1@2395,-1025
  Top Layer w15: U9.7@750,-2290 810,-2350 1090,-2350 ; 1090,-2230 R18.1@1477.44,-2230 ; D1.1@1150,-2760 1150,-2700 ; D3.1@1950,-2760 1950,-2700 ; D2.1@2150,-2760 2150,-2700 ; 2467.56,-2425 R11.1@2467.56,-2365 ; pad.69@2925,-1992.44 L1.2@3005,-1992.44 3147.44,-1850 W2.2@3550,-1850 ; pad.69@2925,-1990 L2.1@2925,-1927.56 L2.1@2925,-1926.95 ; D4.1@4050,-2760 4050,-2690 ; D5.1@4250,-2760 4250,-2690
  Top Layer w20: U9.11@360,-2700 420,-2760 790,-2760 ; U9.13@790,-2700 790,-2760 ; Y3.4@863.43,-941.57 863.43,-876.57 905,-835 pad.0@985,-835 1140,-990 ; R17.2@1229.57,-2100 1090,-2100 ; P1.1@1455,-990 1140,-990 ; pad.68@2925,-2425 2370,-2425 2150,-2645 2150,-2700 1950,-2700 1150,-2700 1090,-2700 ; pad.68@2925,-2424.39 2925,-1992.44 pad.69@2925,-1990 ; L4.2@3345,-1482.44 pad.25@3345,-1430 3345,-945 pad.26@3465,-825 ; 790,-2760 945,-2760 1005,-2700 1090,-2700 ; 1090,-2700 1090,-2350 1090,-2230 1090,-2100 ; 1090,-2100 1090,-1815 1140,-1765 1140,-990
  Top Layer w25: pad.68@2925,-2425 2925,-2640 3035,-2750 3825,-2750 3885,-2690 4050,-2690 4250,-2690 4405,-2690 D9.1@4475,-2760
  Bottom Layer w10: C20.2@432.56,-1972.44 pad.32@432.56,-1802.56 460.12,-1775 595,-1775 625,-1805 pad.31@740,-1805 ; C23.2@600,-2372.44 U9.4@600,-2190 ; 600,-2240 700,-2240 U9.7@750,-2290 750,-2340 717.56,-2372.44 C21.2@650,-2372.44 ; C22.2@755,-1972.44 pad.34@755,-1915 ; pad.49@805,-1360 865,-1420 pad.48@865,-1530 ; pad.65@2271.25,-1020 v1(2276.25,-1025)
  Bottom Layer w15: pad.0@984.84,-834.84 U4.28@984.84,-775 ; pad.0@985,-835 1135,-835 1297.36,-672.64 U7.5@1900,-672.64 1977.48,-672.64 2079.84,-775 U7.28@2159.68,-775 ; pad.76@1855,-1285 1910,-1230 ; 1910,-1225 pad.78@1910,-1020 pad.65@2271.25,-1020 ; U7.28@2159.84,-775 2240,-775 2276.25,-811.25 v1(2276.25,-1025) 2450,-1025 2775,-1350 3265,-1350 pad.25@3345,-1430 ; U5.4@3074,-698.23 3152.23,-698.23 3229,-775 U5.28@3333.84,-775 ; U5.28@3334.84,-775 3415,-775 pad.26@3465,-825 3975,-825 4101.77,-698.23 U6.4@4250,-698.23 ; U6.5@4250,-672.64 U6.4@4250,-698.23 ; U6.28@4508.84,-775 4404,-775 4327.23,-698.23 U6.4@4250,-698.23
  Bottom Layer w20: pad.25@3345,-1430 3345,-1645 W2.2@3550,-1850
CO1_0: P3.1 U4.6 | length 521
  Bottom Layer w15: P3.1@503,-275 503,-524 626.05,-647.05 U4.6@724,-647.05
CO1_1: P3.2 U4.7 | length 587.5
  Bottom Layer w10: P3.2@503,-175 P3.2@504,-175
  Bottom Layer w15: P3.2@504,-175 554,-225 554,-535 640.46,-621.46 U4.7@724,-621.46
CO1_2: P3.3 U4.8 | length 411.5
  Bottom Layer w15: P3.3@603,-275 603,-544 654.87,-595.87 U4.8@724,-595.87
CO1_3: P3.4 U4.9 | length 477.5
  Bottom Layer w15: P3.4@603,-175 654,-226 654,-555 669.28,-570.28 U4.9@724,-570.28
CO1_4: P3.5 pad.2@829,-520 U4.11 | length 401.3
  Top Layer w15: P3.5@703,-275 703,-394 pad.2@829,-520
  Bottom Layer w15: U4.11@724,-519.09 pad.2@828.09,-519.09
CO1_5: P3.6 pad.0@829,-470 U4.12 | length 462.5
  Top Layer w10: P3.6@703,-175 P3.6@704,-175
  Top Layer w15: P3.6@704,-175 754,-225 754,-395 pad.0@829,-470
  Bottom Layer w15: U4.12@724,-493.5 805.5,-493.5 pad.0@829,-470
CO1_6: P3.7 U4.13 | length 257
  Bottom Layer w10: P3.7@803,-275 P3.7@804,-276
  Bottom Layer w15: U4.13@724,-467.91 776.09,-467.91 804,-440 P3.7@804,-276
CO1_7: P3.8 U4.14 | length 300
  Bottom Layer w15: U4.14@724,-442.32 754,-412.32 754,-224 P3.8@803,-175
CO1_8: P3.10 U4.15 | length 300.8
  Bottom Layer w15: P3.10@903,-175 953,-225 953,-411.48 U4.15@983.84,-442.32
CO1_9: P3.9 U4.16 | length 256.8
  Bottom Layer w15: P3.9@903,-275 903,-439 931.91,-467.91 U4.16@983.84,-467.91
CO1_10: P3.12 pad.1@879,-470 U4.17 | length 460.9
  Top Layer w15: pad.1@879,-470 954,-395 954,-224 P3.12@1003,-175
  Bottom Layer w15: pad.1@879,-470 902.5,-493.5 U4.17@983.84,-493.5
CO1_11: P3.11 pad.3@879,-520 U4.18 | length 400.3
  Top Layer w15: pad.3@879,-520 1003,-396 P3.11@1003,-275
  Bottom Layer w15: pad.3@879.91,-519.09 U4.18@983.84,-519.09
CO1_12: P3.14 U4.20 | length 476.8
  Bottom Layer w10: P3.14@1103,-176 P3.14@1103,-175
  Bottom Layer w15: U4.20@983.84,-570.28 1038.72,-570.28 1054,-555 1054,-225 P3.14@1103,-176
CO1_13: P3.13 U4.21 | length 410.8
  Bottom Layer w15: U4.21@983.84,-595.87 1053.13,-595.87 1103,-546 P3.13@1103,-275
CO1_14: P3.16 U4.22 | length 586.3
  Bottom Layer w15: U4.22@983.84,-621.46 1067.54,-621.46 1154,-535 1154,-224 P3.16@1203,-175
CO1_15: P3.15 U4.23 | length 520.3
  Bottom Layer w15: U4.23@983.84,-647.05 1081.95,-647.05 1203,-526 P3.15@1203,-275
CO2_0: P6.1 U7.6 | length 521
  Bottom Layer w15: P6.1@1678,-275 1678,-524 1801.05,-647.05 U7.6@1899,-647.05
CO2_1: P6.2 U7.7 | length 587.5
  Bottom Layer w10: P6.2@1678,-175 P6.2@1679,-175
  Bottom Layer w15: P6.2@1679,-175 1729,-225 1729,-535 1815.46,-621.46 U7.7@1899,-621.46
CO2_2: P6.3 U7.8 | length 411.5
  Bottom Layer w15: P6.3@1778,-275 1778,-544 1829.87,-595.87 U7.8@1899,-595.87
CO2_3: P6.4 U7.9 | length 477.5
  Bottom Layer w15: P6.4@1778,-175 1829,-226 1829,-555 1844.28,-570.28 U7.9@1899,-570.28
CO2_4: P6.5 pad.2@2004,-520 U7.11 | length 401.3
  Top Layer w15: P6.5@1878,-275 1878,-394 pad.2@2004,-520
  Bottom Layer w15: U7.11@1899,-519.09 pad.2@2003.09,-519.09
CO2_5: P6.6 pad.0@2004,-470 U7.12 | length 462.5
  Top Layer w10: P6.6@1878,-175 P6.6@1879,-175
  Top Layer w15: P6.6@1879,-175 1929,-225 1929,-395 pad.0@2004,-470
  Bottom Layer w15: U7.12@1899,-493.5 1980.5,-493.5 pad.0@2004,-470
CO2_6: P6.7 U7.13 | length 257
  Bottom Layer w10: P6.7@1978,-275 P6.7@1979,-276
  Bottom Layer w15: U7.13@1899,-467.91 1951.09,-467.91 1979,-440 P6.7@1979,-276
CO2_7: P6.8 U7.14 | length 300
  Bottom Layer w15: U7.14@1899,-442.32 1929,-412.32 1929,-224 P6.8@1978,-175
CO2_8: P6.10 U7.15 | length 300.8
  Bottom Layer w15: P6.10@2078,-175 2128,-225 2128,-411.48 U7.15@2158.84,-442.32
CO2_9: P6.9 U7.16 | length 256.8
  Bottom Layer w15: P6.9@2078,-275 2078,-439 2106.91,-467.91 U7.16@2158.84,-467.91
CO2_10: P6.12 pad.1@2054,-470 U7.17 | length 460.9
  Top Layer w15: pad.1@2054,-470 2129,-395 2129,-224 P6.12@2178,-175
  Bottom Layer w15: pad.1@2054,-470 2077.5,-493.5 U7.17@2158.84,-493.5
CO2_11: P6.11 pad.3@2054,-520 U7.18 | length 400.3
  Top Layer w15: pad.3@2054,-520 2178,-396 P6.11@2178,-275
  Bottom Layer w15: pad.3@2054.91,-519.09 U7.18@2158.84,-519.09
CO2_12: P6.14 U7.20 | length 476.8
  Bottom Layer w10: P6.14@2278,-176 P6.14@2278,-175
  Bottom Layer w15: U7.20@2158.84,-570.28 2213.72,-570.28 2229,-555 2229,-225 P6.14@2278,-176
CO2_13: P6.13 U7.21 | length 410.8
  Bottom Layer w15: U7.21@2158.84,-595.87 2228.13,-595.87 2278,-546 P6.13@2278,-275
CO2_14: P6.16 U7.22 | length 586.3
  Bottom Layer w15: U7.22@2158.84,-621.46 2242.54,-621.46 2329,-535 2329,-224 P6.16@2378,-175
CO2_15: P6.15 U7.23 | length 520.3
  Bottom Layer w15: U7.23@2158.84,-647.05 2256.95,-647.05 2378,-526 P6.15@2378,-275
CO3_0: P4.1 U5.6 | length 521
  Bottom Layer w15: P4.1@2853,-275 2853,-524 2976.05,-647.05 U5.6@3074,-647.05
CO3_1: P4.2 U5.7 | length 587.5
  Bottom Layer w10: P4.2@2853,-175 P4.2@2854,-175
  Bottom Layer w15: P4.2@2854,-175 2904,-225 2904,-535 2990.46,-621.46 U5.7@3074,-621.46
CO3_2: P4.3 U5.8 | length 411.5
  Bottom Layer w15: P4.3@2953,-275 2953,-544 3004.87,-595.87 U5.8@3074,-595.87
CO3_3: P4.4 U5.9 | length 477.5
  Bottom Layer w15: P4.4@2953,-175 3004,-226 3004,-555 3019.28,-570.28 U5.9@3074,-570.28
CO3_4: P4.5 pad.2@3179,-520 U5.11 | length 401.3
  Top Layer w15: P4.5@3053,-275 3053,-394 pad.2@3179,-520
  Bottom Layer w15: U5.11@3074,-519.09 pad.2@3178.09,-519.09
CO3_5: P4.6 pad.0@3179,-470 U5.12 | length 462.5
  Top Layer w10: P4.6@3053,-175 P4.6@3054,-175
  Top Layer w15: P4.6@3054,-175 3104,-225 3104,-395 pad.0@3179,-470
  Bottom Layer w15: U5.12@3074,-493.5 3155.5,-493.5 pad.0@3179,-470
CO3_6: P4.7 U5.13 | length 257
  Bottom Layer w10: P4.7@3153,-275 P4.7@3154,-276
  Bottom Layer w15: U5.13@3074,-467.91 3126.09,-467.91 3154,-440 P4.7@3154,-276
CO3_7: P4.8 U5.14 | length 300
  Bottom Layer w15: U5.14@3074,-442.32 3104,-412.32 3104,-224 P4.8@3153,-175
CO3_8: P4.10 U5.15 | length 300.8
  Bottom Layer w15: P4.10@3253,-175 3303,-225 3303,-411.48 U5.15@3333.84,-442.32
CO3_9: P4.9 U5.16 | length 256.8
  Bottom Layer w15: P4.9@3253,-275 3253,-439 3281.91,-467.91 U5.16@3333.84,-467.91
CO3_10: P4.12 pad.1@3229,-470 U5.17 | length 460.9
  Top Layer w15: pad.1@3229,-470 3304,-395 3304,-224 P4.12@3353,-175
  Bottom Layer w15: pad.1@3229,-470 3252.5,-493.5 U5.17@3333.84,-493.5
CO3_11: P4.11 pad.3@3229,-520 U5.18 | length 400.3
  Top Layer w15: pad.3@3229,-520 3353,-396 P4.11@3353,-275
  Bottom Layer w15: pad.3@3229.91,-519.09 U5.18@3333.84,-519.09
CO3_12: P4.14 U5.20 | length 476.8
  Bottom Layer w10: P4.14@3453,-176 P4.14@3453,-175
  Bottom Layer w15: U5.20@3333.84,-570.28 3388.72,-570.28 3404,-555 3404,-225 P4.14@3453,-176
CO3_13: P4.13 U5.21 | length 410.8
  Bottom Layer w15: U5.21@3333.84,-595.87 3403.13,-595.87 3453,-546 P4.13@3453,-275
CO3_14: P4.16 U5.22 | length 586.3
  Bottom Layer w15: U5.22@3333.84,-621.46 3417.54,-621.46 3504,-535 3504,-224 P4.16@3553,-175
CO3_15: P4.15 U5.23 | length 520.3
  Bottom Layer w15: U5.23@3333.84,-647.05 3431.95,-647.05 3553,-526 P4.15@3553,-275
CO4_0: P5.1 U6.6 | length 521
  Bottom Layer w15: P5.1@4028,-275 4028,-524 4151.05,-647.05 U6.6@4249,-647.05
CO4_1: P5.2 U6.7 | length 587.5
  Bottom Layer w10: P5.2@4028,-175 P5.2@4029,-175
  Bottom Layer w15: P5.2@4029,-175 4079,-225 4079,-535 4165.46,-621.46 U6.7@4249,-621.46
CO4_2: P5.3 U6.8 | length 411.5
  Bottom Layer w15: P5.3@4128,-275 4128,-544 4179.87,-595.87 U6.8@4249,-595.87
CO4_3: P5.4 U6.9 | length 477.5
  Bottom Layer w15: P5.4@4128,-175 4179,-226 4179,-555 4194.28,-570.28 U6.9@4249,-570.28
CO4_4: P5.5 pad.2@4354,-520 U6.11 | length 401.3
  Top Layer w15: P5.5@4228,-275 4228,-394 pad.2@4354,-520
  Bottom Layer w15: U6.11@4249,-519.09 pad.2@4353.09,-519.09
CO4_5: P5.6 pad.0@4354,-470 U6.12 | length 462.5
  Top Layer w10: P5.6@4228,-175 P5.6@4229,-175
  Top Layer w15: P5.6@4229,-175 4279,-225 4279,-395 pad.0@4354,-470
  Bottom Layer w15: U6.12@4249,-493.5 4330.5,-493.5 pad.0@4354,-470
CO4_6: P5.7 U6.13 | length 257
  Bottom Layer w10: P5.7@4328,-275 P5.7@4329,-276
  Bottom Layer w15: U6.13@4249,-467.91 4301.09,-467.91 4329,-440 P5.7@4329,-276
CO4_7: P5.8 U6.14 | length 300
  Bottom Layer w15: U6.14@4249,-442.32 4279,-412.32 4279,-224 P5.8@4328,-175
CO4_8: P5.10 U6.15 | length 300.8
  Bottom Layer w15: P5.10@4428,-175 4478,-225 4478,-411.48 U6.15@4508.84,-442.32
CO4_9: P5.9 U6.16 | length 256.8
  Bottom Layer w15: P5.9@4428,-275 4428,-439 4456.91,-467.91 U6.16@4508.84,-467.91
CO4_10: P5.12 pad.1@4404,-470 U6.17 | length 460.9
  Top Layer w15: pad.1@4404,-470 4479,-395 4479,-224 P5.12@4528,-175
  Bottom Layer w15: pad.1@4404,-470 4427.5,-493.5 U6.17@4508.84,-493.5
CO4_11: P5.11 pad.3@4404,-520 U6.18 | length 400.3
  Top Layer w15: pad.3@4404,-520 4528,-396 P5.11@4528,-275
  Bottom Layer w15: pad.3@4404.91,-519.09 U6.18@4508.84,-519.09
CO4_12: P5.14 U6.20 | length 476.8
  Bottom Layer w10: P5.14@4628,-176 P5.14@4628,-175
  Bottom Layer w15: U6.20@4508.84,-570.28 4563.72,-570.28 4579,-555 4579,-225 P5.14@4628,-176
CO4_13: P5.13 U6.21 | length 410.8
  Bottom Layer w15: U6.21@4508.84,-595.87 4578.13,-595.87 4628,-546 P5.13@4628,-275
CO4_14: P5.16 U6.22 | length 586.3
  Bottom Layer w15: U6.22@4508.84,-621.46 4592.54,-621.46 4679,-535 4679,-224 P5.16@4728,-175
CO4_15: P5.15 U6.23 | length 520.3
  Bottom Layer w15: U6.23@4508.84,-647.05 4606.95,-647.05 4728,-526 P5.15@4728,-275
E-CRS: pad.54 U10.40 | length 399.4
  Top Layer w10: pad.54@674.21,-1499.21 U10.40@674.21,-1400.71
  Bottom Layer w10: pad.54@675,-1500 675,-1385 745,-1315 831.86,-1315
E-CSR: pad.56 U1.92 | length 95.1
  Top Layer w10: pad.56@2321.26,-1433.74 U1.92@2321.26,-1352.76
  Bottom Layer w10: pad.56@2310,-1425 pad.56@2320,-1435
E-MDC: pad.43 pad.45 U1.87 U10.31 | length 1803.8
  Top Layer w10: U10.31@794.29,-1560.16 1014.84,-1560.16 1040,-1535 pad.45@1075,-1535 ; pad.43@2405,-1490 2419.68,-1475.32 U1.87@2419.68,-1352.76
  Bottom Layer w10: pad.45@1075,-1535 1100,-1560 2275,-1560 2345,-1490 pad.43@2405,-1490
E-MDIO: pad.42 pad.44 R45.2 U1.86 U10.30 | length 1909.5
  Top Layer w10: U10.30@794.29,-1579.84 pad.44@1049.86,-1579.84 ; R45.2@1050,-1652.44 pad.44@1050,-1579.98 ; pad.42@2439.37,-1519.37 U1.86@2439.37,-1352.76
  Bottom Layer w10: pad.44@1049.86,-1579.84 2284.88,-1579.84 ; 2285.02,-1579.98 2345,-1520 pad.42@2440,-1520
E-REF-CLK: pad.46 pad.47 U1.88 U10.34 Y3.3 | length 2451.2
  Top Layer w10: U10.34@794.29,-1501.1 1025,-1501.1 1025,-1205 958.43,-1138.43 Y3.3@863.43,-1138.43 ; U1.88@2400,-1352.76 2400,-1285 pad.46@2435,-1250
  Bottom Layer w10: pad.47@1025,-1500 1095,-1500 1135,-1540 2266.72,-1540 2435,-1371.72 pad.46@2435,-1250
E-RX-ER: pad.55 pad.57 U1.89 U10.41 | length 2215.7
  Top Layer w10: U10.41@654.53,-1400.71 654.53,-1310.47 pad.55@670,-1295 ; U1.89@2380.32,-1352.76 2380.32,-1224.68 pad.57@2395,-1210
  Bottom Layer w10: pad.55@670,-1295 840.15,-1295 950.15,-1405 1120,-1405 1175,-1460 2155,-1460 2215,-1400 2340,-1400 2380,-1360 2380,-1225
E-RXD0: pad.60 pad.62 U1.91 U10.43 | length 2203.3
  Top Layer w10: U10.43@615.16,-1400.71 pad.60@615.16,-1240 ; pad.62@2275,-1205 2340.94,-1270.94 U1.91@2340.94,-1352.76
  Bottom Layer w10: pad.60@615,-1240 841.72,-1240 966.72,-1365 1140,-1365 1195,-1420 2135,-1420 2245,-1310 2245,-1235 pad.62@2275,-1205
E-RXD1: pad.59 pad.63 U1.90 U10.44 | length 2367.5
  Top Layer w10: pad.59@575,-1210 575,-1275 595.47,-1295.47 U10.44@595.47,-1400.71 ; pad.63@2310,-1170 2360.63,-1220.63 U1.90@2360.63,-1352.76
  Bottom Layer w10: pad.59@575,-1210 840,-1210 975,-1345 1150,-1345 1205,-1400 2125,-1400 2225,-1300 2225,-1205 2260,-1170 pad.63@2310,-1170